# EAGLE board Logic Module V3 (EAGLE 9.6.2)
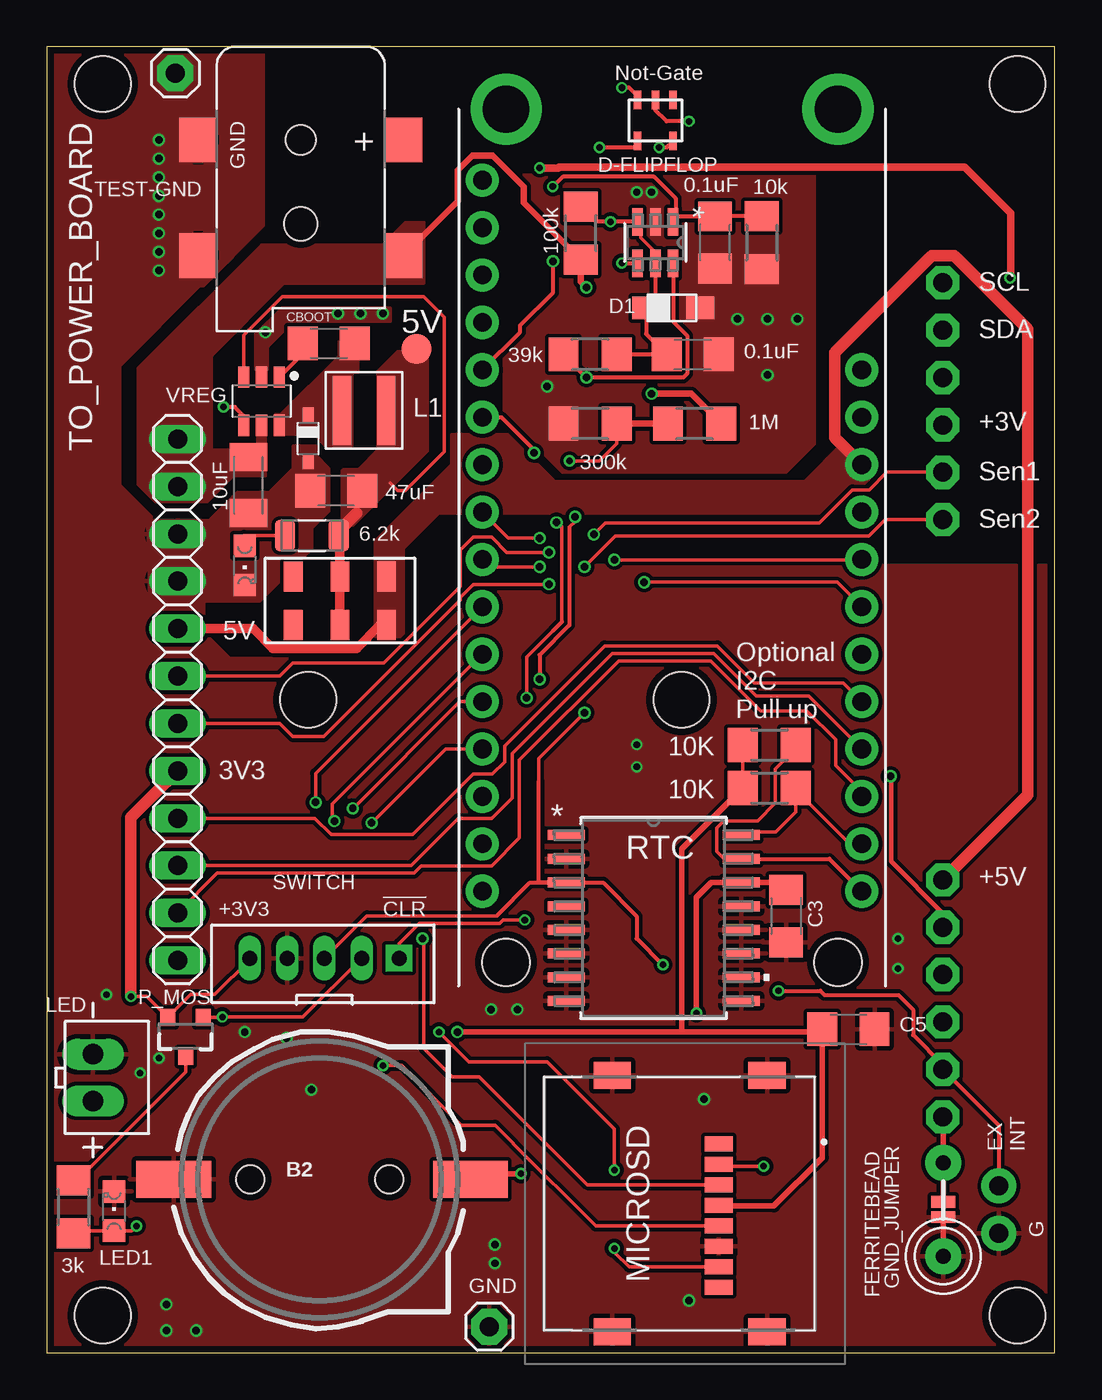
[diagram p0: board, top side]
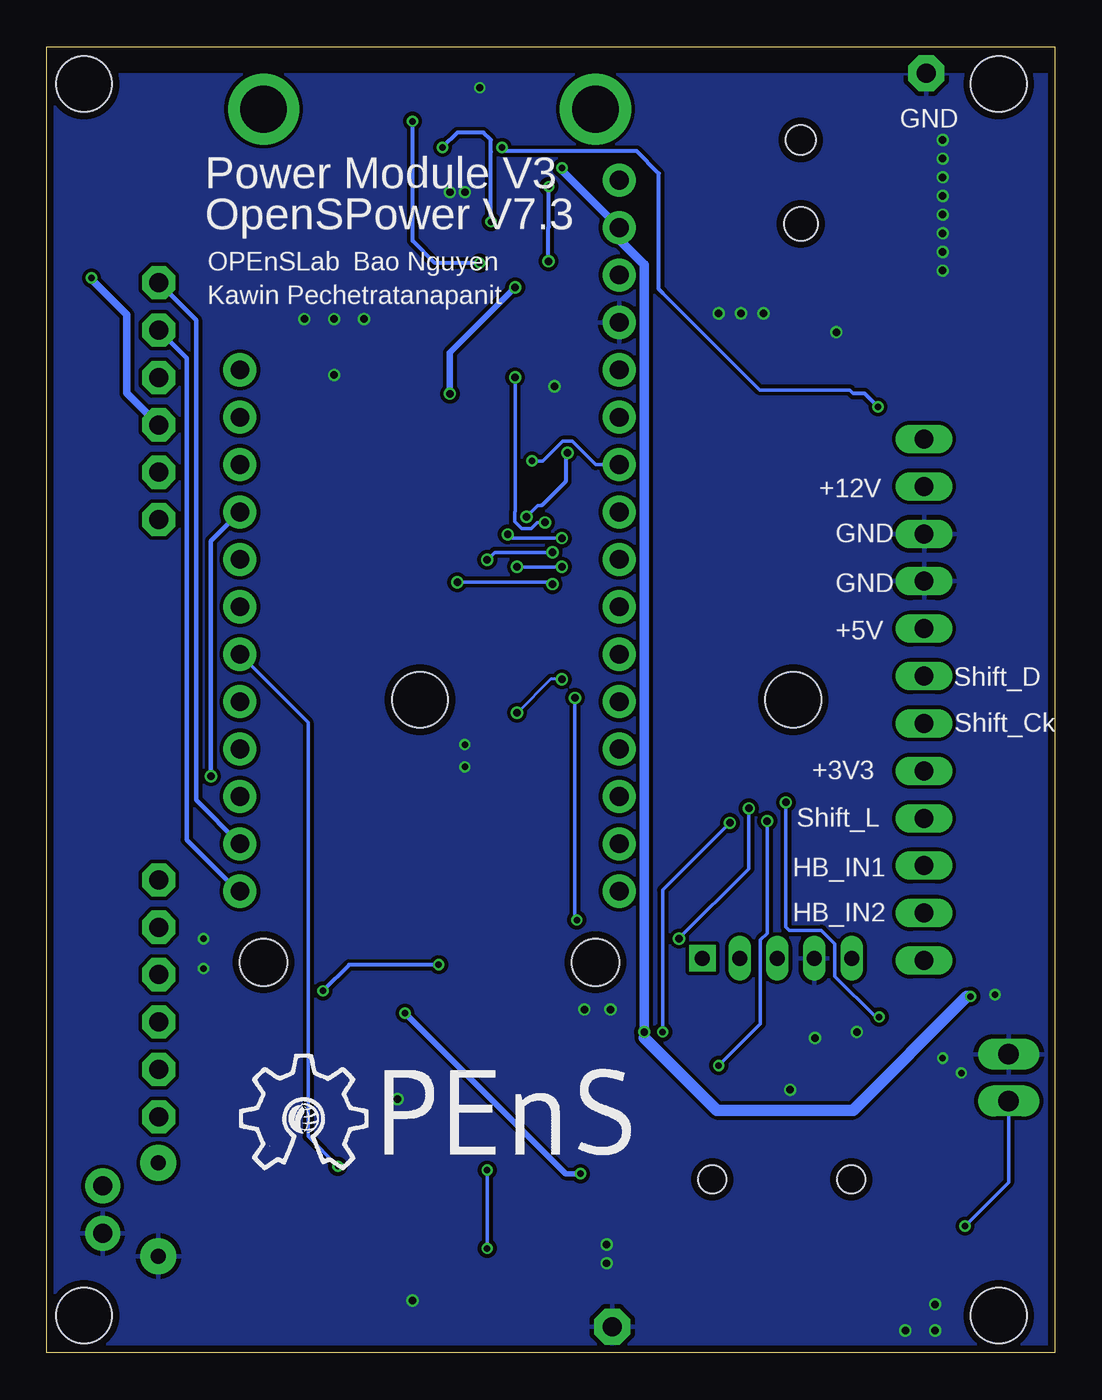
[diagram p1: board, bottom side, seen from below]

Size 54 x 70 mm. Coordinates in mm from the lower left corner, seen from the top.
Outline: 0,0 54,0 54,70 0,70 0,0
Copper layers (1*16): Top 0.035559375mm / dielectric 1.6mm / Bottom 0.035559375mm
Design rules "oshpark-2layer *": minimum track width 6mil, minimum drill 10mil, track to track 6mil, track to pad 6mil, pad to pad 6mil, via to via 6mil, smd to smd 6mil, copper to edge 15mil, drill to drill 6mil, minimum pad ring 5mil, minimum via ring 5mil, stop-mask expansion 2.5mil, vias tented up to drill 30mil, thermal gap 10mil
Net classes: 0 default: clearance 0.2 mm; 1 12v: width 0.356 mm, clearance 0.254 mm; 2 5v: width 0.406 mm, clearance 0.2 mm; 3 sig: width 0.152 mm, clearance 0.2 mm
Holes 3 mm at 3,2 52,68 52,2 14,35 34,35 3,68

## Footprints (pad centres in the part's own frame; a part is rotated, then mirrored left to right if it is on the bottom)
TP16R = smd 1.6 x 1.6: TP 0,0
DCJACK_2MM_SMT = smd 2.4 x 2: GND 0,-5.5; GNDBREAK 6.2,-5.5; PWR1 0,5.5; PWR2 6.2,5.5 | hole 1.6: 0,0 | hole 1.8: 4.5,0
CR1220-2 = smd 4 x 2: + 8.29,0; - -7.6,0 | hole 1.5: 3.95,0; -3.5,0
C1206 = smd 1.6 x 1.8: 1 -1.4,0; 2 1.4,0
C1206K = smd 1.5 x 2: 1 -1.5,0; 2 1.5,0
DO-219AC = smd 1.5 x 1.2: BCK 2.9,0; FNT 0,0
SOD323_ST = smd 0.8 x 0.6: A 1.25,0; C -1.25,0
DBV6 = smd 1.473 x 0.559: 1 -1.118,0.95; 2 -1.118,0; 3 -1.118,-0.95; 4 1.118,-0.95; 5 1.118,0; 6 1.118,0.95
1X02_NO_SILK = drill 1.016 pad 1.88: 1 0,0; 2 2.54,0
FB = drill 0.8 pad 1.93: P$1 -2.5,0; P$2 2.5,0
SMT-JUMPER_2_NO_NO-SILK = smd 0.635 x 1.27: 1 -0.406,0; 2 0.406,0
WE-MAPI_40XX = smd 0.98 x 3.7: 1 -1.185,0; 2 1.185,0
JST_2POS_2.5MM_UP = drill 1.1 long: 1 -1.25,0; 2 1.25,0
CHIPLED_0805 = smd 1.2 x 1.2: A 0,-1.05; C 0,1.05
472192001 = smd 0.8 x 1.5: 1 3.205,-1.8; 2 2.105,-1.8; 3 1.005,-1.8; 4 -0.095,-1.8; 5 -1.195,-1.8; 6 -2.295,-1.8; 7 -3.395,-1.8; 8 -4.495,-1.8 | smd 1.45 x 2: 9 -6.875,-4.4; 10 -6.875,3.9; 11 6.875,3.9; 12 6.875,-4.4
FEATHERWING = drill 1 pad 1.778: 1 6.35,1.27; 2 8.89,1.27; 3 11.43,1.27; 4 13.97,1.27; 5 16.51,1.27; 6 19.05,1.27; 7 21.59,1.27; 8 24.13,1.27; 9 26.67,1.27; 10 29.21,1.27; 11 31.75,1.27; 12 34.29,1.27; 13 36.83,1.27; 14 39.37,1.27; 15 41.91,1.27; 16 44.45,1.27; 17 44.45,21.59; 18 41.91,21.59; 19 39.37,21.59; 20 36.83,21.59; 21 34.29,21.59; 22 31.75,21.59; 23 29.21,21.59; 24 26.67,21.59; 25 24.13,21.59; 26 21.59,21.59; 27 19.05,21.59; 28 16.51,21.59 | drill 2.5 pad 3.81: P$1 2.54,20.32; P$2 2.54,2.54 | hole 2.54: 48.26,20.32; 48.26,2.54
SOT23-3 = smd 0.8 x 0.9: 1 -0.95,-1; 2 0.95,-1; 3 0,1.1
R1206 = smd 1.6 x 1.803: 1 -1.422,0; 2 1.422,0
RES_1206 = smd 1.08 x 1.68: 1 -1.445,0; 2 1.445,0
21-0042B_16 = smd 1.981 x 0.533: 1 -4.686,4.445; 2 -4.686,3.175; 3 -4.686,1.905; 4 -4.686,0.635; 5 -4.686,-0.635; 6 -4.686,-1.905; 7 -4.686,-3.175; 8 -4.686,-4.445; 9 4.686,-4.445; 10 4.686,-3.175; 11 4.686,-1.905; 12 4.686,-0.635; 13 4.686,0.635; 14 4.686,1.905; 15 4.686,3.175; 16 4.686,4.445
2MM_5POS_HEADER = drill 0.8 pad 1.422 square: 1 -4,0 | drill 0.8 long: 2 -2,0; 3 0,0; 4 2,0; 5 4,0
1X01 = drill 1.016 pad 1.93 octagon: 1 0,0
1X12 = drill 1.016 long: 1 -13.97,0; 2 -11.43,0; 3 -8.89,0; 4 -6.35,0; 5 -3.81,0; 6 -1.27,0; 7 1.27,0; 8 3.81,0; 9 6.35,0; 10 8.89,0; 11 11.43,0; 12 13.97,0
1X06-CLEANBIG = drill 1.016 pad 1.778 octagon: 1 -6.35,0; 2 -3.81,0; 3 -1.27,0; 4 1.27,0; 5 3.81,0; 6 6.35,0
JS-DPDT-SMD = smd 1 x 1.6: P$1 0,0; P$2 2.5,0; P$3 5,0; P$4 0,2.6; P$5 2.5,2.6; P$6 5,2.6
SOT753 = smd 1 x 0.4: 1 -1.14,0.95; 2 -1.14,0; 3 -1.14,-0.95; 4 1.06,-0.95; 5 1.06,0.95
SOT23-6 = smd 1.146 x 0.597: 1 -1.287,0.95; 2 -1.287,0; 3 -1.287,-0.95; 4 1.287,-0.95; 5 1.287,0; 6 1.287,0.95

## Placement (x,y rotation side)
5V  TPTP16R  [TP16R]  19.8,53.8 0 top
12V_IN  2.1MMJACKSMT  [DCJACK_2MM_SMT]  13.6,65 270 top
B2  cr1220  [CR1220-2]  14.4,9.3 0 top
C1  0.1uF  [C1206]  34.6,53.5 0 top
C2  0.1uF  [C1206]  35.8,59.5 90 top
C3  0.1uF  [C1206]  39.6,23.4 270 top
C5  100nF  [C1206]  42.94,17.34 0 top
CBOOT  100nF  [C1206]  15.1,54.1 0 top
CIN  10uF  [C1206K]  10.8,46.5 270 top
COUT  47uF  [C1206]  15.5,46.2 180 top
D1  4.3V  [DO-219AC]  32.1,56 0 top
D3  NSR0320MW2T1G  [SOD323_ST]  14,49 270 top
D-FLIPFLOP  SN74LVC1G175DBVR  [DBV6]  32.6,59.5 270 top
EXTERNAL_INT  [1X02_NO_SILK]  51,6.4 90 top
FERRITEBEAD  FB  [FB]  48.02,7.68 270 top
GND_JUMPER  [SMT-JUMPER_2_NO_NO-SILK]  48.02,7.68 90 top
L1  10UH 2.7A  [WE-MAPI_40XX]  17,50.5 0 top
LED  2.5MM_JST_UP_2POS  [JST_2POS_2.5MM_UP]  2.46,14.75 270 top
LED1  Yellow  [CHIPLED_0805]  3.6,7.6 0 top
LED2  RED  [CHIPLED_0805]  10.6,42.2 180 top
MICROSD  47219-2001  [472192001]  34.19,8 90 top
MS1  FEATHERWING  [FEATHERWING]  22.06,69.19 270 top
P_MOS  130mA/20V  [SOT23-3]  7.43,16.97 180 top
R1  1M  [R1206]  34.7,49.8 0 top
R2  300k  [R1206]  29.1,49.8 0 top
R3  10K  [R1206]  38.7,30.27 180 top
R4  3k  [R1206]  1.42,7.82 90 top
R5  10K  [R1206]  38.7,32.57 180 top
R6  100k  [R1206]  28.6,60 270 top
R7  39k  [R1206]  29.1,53.5 0 top
R8  10k  [R1206]  38.3,59.5 90 top
R11  6.2k  [RES_1206]  14.2,43.8 0 top
RTC  DS3231SNT&R  [21-0042B_16]  32.5,23.3 0 top
SWITCH  2MM_JST_PH_5POS  [2MM_5POS_HEADER]  14.87,21.15 180 top
TEST-GND  [1X01]  6.88,68.58 90 top
TEST-GND1  [1X01]  23.7,1.4 0 top
TO_POWER_BOARD  [1X12]  7,35 270 top
TO_SENSOR_BOARD1  [1X06-CLEANBIG]  48,51 270 top
TO_SENSOR_BOARD2  [1X06-CLEANBIG]  48,19 270 top
U$1  2PDT_SWITCHJS-SMD  [JS-DPDT-SMD]  18.2,41.6 180 top
U$2  [OPENS-LOGO]  43.92,6.09 0 bottom
U$3  NOT_GATE  [SOT753]  32.6,66 270 top
VREG  BUCK_REGULATORS  [SOT23-6]  11.5,51 270 top

## Library data of the parts
5V = testpad
12V_IN C1-C3 FERRITEBEAD LED1 LED2 MS1 R1 R2 R6-R8 TEST-GND TEST-GND1 TO_POWER_BOARD TO_SENSOR_BOARD1 TO_SENSOR_BOARD2 = adafruit
B2 = microbuilder
C5 R4 = resistor
CBOOT CIN COUT = rcl; SPICEPREFIX: C
D1 = beach
D3 = diode
D-FLIPFLOP = eDNA; MANUFACTURER_PART_NUMBER: SN74LVC1G175DBVR; VENDOR: Texas Instruments
EXTERNAL_INT = SparkFun-Connectors
GND_JUMPER = SparkFun-Jumpers
L1 = EMCComponents (rev19e); WE-NUMBER: 74438357100/10uH
LED SWITCH U$1 U$3 VREG = eDNA
MICROSD = SamacSys_Parts; DESCRIPTION: Molex 47219 Series 8 Way Horizontal Hinged Micro SD Memory Card Connector with Solder Termination; HEIGHT: mm; MANUFACTURER_NAME: Molex; MANUFACTURER_PART_NUMBER: 47219-2001; MOUSER_PART_NUMBER: 538-47219-2001; MOUSER_PRICE-STOCK: https://www.mouser.com/Search/Refine.aspx?Keyword=538-47219-2001
P_MOS = SparkFun-DiscreteSemi; PROD_ID: TRANS-11153
R3 R5 = rcl; SPICEPREFIX: R
R11 = Resistor_Capacitor; CREATED_BY: PCBLayout.com; DIGIKEY_PART_NUMBER: WSLP-.05TR-ND; MANUFACTURER: Vishay Dale; MPN: WSLP1206R0500FEA; PACKAGE: SMD 1206
RTC = eDNA; MANUFACTURER_PART_NUMBER: DS3231SN#T&R; VENDOR: Maxim Integrated Products
U$2 = opens-logo

## Nets
2.2VCC [sig]: C1.1 D1.FNT D-FLIPFLOP.3 D-FLIPFLOP.5 R6.1 R7.2 U$3.5
5VUSB: 5V.TP COUT.1 L1.2 R11.2 U$1.P$2 U$1.P$5 VREG.3
!CLR: D-FLIPFLOP.6 R7.1 SWITCH.1
!EN: D-FLIPFLOP.4 U$3.2
+3V3: C5.1 MICROSD.4 MS1.2 P_MOS.2 R3.2 R5.2 SWITCH.5 TO_POWER_BOARD.8 TO_SENSOR_BOARD1.4
+5V: MS1.26 TO_POWER_BOARD.5 TO_SENSOR_BOARD2.1 U$1.P$1 U$1.P$4
+12V [12v]: 12V_IN.PWR2 CIN.1 R1.2 R6.2 TO_POWER_BOARD.1 TO_POWER_BOARD.2 VREG.5
BATTERY_READ: MS1.7 R1.1 R2.2
BUTTON1: MS1.25 TO_SENSOR_BOARD2.2
CS: MICROSD.2 MS1.22
DI: MICROSD.3 MS1.12
DO: MICROSD.7 MS1.13
EN: U$3.4 VREG.4
GND: 12V_IN.GND 12V_IN.GNDBREAK B2.- C1.2 C2.1 C3.2 C5.2 CIN.2 COUT.2 D1.BCK D3.A D-FLIPFLOP.2 EXTERNAL_INT.1 FERRITEBEAD.P$2 GND_JUMPER.1 LED1.C LED2.C LED.1 MICROSD.6 MICROSD.9 MICROSD.10 MICROSD.11 MICROSD.12 MS1.4 R2.1 R8.1 RTC.2 RTC.5 RTC.6 RTC.7 RTC.8 RTC.9 RTC.10 RTC.11 RTC.12 RTC.13 SWITCH.4 TEST-GND1.1 TEST-GND.1 TO_POWER_BOARD.3 TO_POWER_BOARD.4 U$3.3 VREG.2
HB_IN1: MS1.20 TO_POWER_BOARD.10
HB_IN2: MS1.19 TO_POWER_BOARD.11
N$1: B2.+ C3.1 RTC.14
N$2: P_MOS.3 R4.2
N$3: LED1.A LED.2 R4.1
N$6: FERRITEBEAD.P$1 GND_JUMPER.2 TO_SENSOR_BOARD2.6
N$12: LED2.A R11.1
N$16: CBOOT.1 VREG.1
N$17: CBOOT.2 D3.C L1.1 VREG.6
RTC_INT: EXTERNAL_INT.2 MS1.6 RTC.3 SWITCH.3 TO_SENSOR_BOARD2.5
SCK: MICROSD.5 MS1.11
SCL: MS1.18 R3.1 RTC.16 TO_SENSOR_BOARD1.1
SDA: MS1.17 R5.1 RTC.15 TO_SENSOR_BOARD1.2
SENSOR1: MS1.8 TO_SENSOR_BOARD1.5
SENSOR2: MS1.9 TO_SENSOR_BOARD1.6
SHIFT_CLK: MS1.23 TO_POWER_BOARD.7
SHIFT_DATA: MS1.24 TO_POWER_BOARD.6
SHIFT_LATCH: MS1.21 TO_POWER_BOARD.9
SHUTDOWN: C2.2 D-FLIPFLOP.1 MS1.5 R8.2
WAKE_NOSLEEP: MS1.10 P_MOS.1 SWITCH.2

## Tracks (layer width: path | path; a pad name or v marks a point on that pad's centre or on a via)
2.2VCC  (via drill 0.35)
  Top 0.2: D-FLIPFLOP.3 31.82,60.45 31.82,59.76 32.6,58.98 D-FLIPFLOP.5
  Top 0.203: D-FLIPFLOP.5 32.6,56.5 D1.FNT 32.1,54.6 C1.1 R7.2 | R6.1 29.4,60.62 v30.2,60.62 D-FLIPFLOP.3 | v32.8,64.6 33.21,64.6 U$3.5
  Bottom 0.203: v30.2,60.62 30.2,64.35 30.2,65 30.6,65.4 32,65.4 v32.8,64.6
5VUSB
  Top 0.2: VREG.3 10.55,54.55 12.6,56.6 20.2,56.6 21.3,55.5 21.3,48.3 19.2,46.2 18.8,46.2 18.4,46.6
  Top 0.406: 15.7,43.74 R11.2
  Top 0.508: 15.7,43.74 U$1.P$2 U$1.P$5 | 16.9,45.6 COUT.1
  Top 0.61: R11.2 15.64,44.05 16.6,45
  pour Top (no thermals): 17.7,52.6 18.8,53.7 20.4,53.7 20.4,48.3 16.4,44.3 15.8,44.3 15.8,47.3 15.9,47.4 16.7,47.4 17.7,48.4
!CLR  (via drill 0.35, 0.4)
  Top 0.2: 27.59,39.17 27.59,44.29 27.51,44.29 v27.3,44.5 | 27.11,38.69 25.7,37.28 v25.7,35.1 | v25.6,23.2 24.44,23.2 24.27,23.02 19.94,23.02 18.87,21.95 SWITCH.1
  Top 0.203: D-FLIPFLOP.6 33.55,55.28 34.3,54.52 34.3,52.48 34.1,52.27 v28.91,52.27 R7.1 | 27.59,39.17 27.11,38.69
  Bottom 0.2: v25.7,35.1 25.7,23.5 25.6,23.4 v25.6,23.2 | v27.3,44.5 27.71,44.5 28.04,44.17 28.56,44.17 28.93,44.54 28.93,45.06 28.91,45.08 v28.91,52.27
!EN  (via drill 0.35)
  Top 0.203: D-FLIPFLOP.4 30.82,58.38 v30.8,58.4 | v34.4,66 33.2,66 32.6,66.6 U$3.2
  Bottom 0.203: v30.8,58.4 33.2,58.4 34.4,59.6 v34.4,66
+3V3  (via drill 0.35, 0.4)
  Top 0.2: R3.2 R5.2 | v4.5,19.1 5.35,19.1 P_MOS.2 7.71,19.2 9,19.2 10.87,21.07 SWITCH.5
  Top 0.305: v21.99,17.2 34,17.2 | 34,17.2 41.4,17.2 C5.1 41.54,10.46 38.95,7.87 36.02,7.87 MICROSD.4 | R3.2 34,27 34,17.2
  Top 0.406: v26.4,63.5 27.39,63.5 27.41,63.53 49.17,63.53 51.63,61.07 51.63,57.63 v51.6,57.6
  Top 0.61: TO_POWER_BOARD.8 5.73,29.92 5.71,29.92 4.5,28.7 v4.5,19.1
  Bottom 0.406: MS1.2 26.4,63.37 v26.4,63.5 | v51.6,57.6 51.6,57.53 49.7,55.63 49.7,51.43 TO_SENSOR_BOARD1.4
  Bottom 0.508: MS1.2 23.33,59.66 21.99,58.32 v21.99,17.2 21.99,16.89
  Bottom 0.61: 21.99,16.89 18.1,13 10.8,13 4.7,19.1 v4.5,19.1
+5V
  Top 0.508: TO_POWER_BOARD.5 11.05,38.81 12.11,37.75 16.59,37.75 17.84,39 U$1.P$4
  Top 0.61: TO_SENSOR_BOARD2.1 52.55,29.89 52.55,54.85 48.6,58.8 47.4,58.8 42.9,54.3 42.2,53.6 42.2,49.05 MS1.26
  pour Top (no thermals): 17.6,38.4 17.6,43.5 21.7,47.6 21.7,49.2 24.7,49.2 27.2,46.7 40.6,46.7 42.7,48.8 44.2,47.3 44.2,47 42.2,45 21,45 19.1,43.1 19.1,38.4
+12V  (via drill 0.4)
  Top 0.356: 12V_IN.PWR2 22.01,61.71 22.01,63.39 22.78,64.16 23.88,64.16 25.55,62.49 25.55,61.63 R6.2 28.6,57.4 v28.9,57.1 | v32.4,51.4 34.52,51.4 R1.2
  Bottom 0.356: v28.9,57.1 32.4,53.6 v32.4,51.4
  pour Top (no thermals): 20.2,60.6 20.2,57.3 12.7,57.3 8.8,53.4 8.8,48.4 11.1,48.4 11.3,48.6 11.3,49.7 11.7,49.7 11.7,46.98 9.98,46.98 8.6,45.6 5.8,45.6 4.9,46.5 4.9,52.8 11.5,59.4 18,59.4 19.2,60.6
BATTERY_READ  (via drill 0.35)
  Top 0.2: v28,47.8 29.6,47.8 30.52,48.72 R2.2
  Top 0.356: R2.2 R1.1
  Bottom 0.2: MS1.7 24.59,47.6 25.84,48.85 26.36,48.85 27.41,47.8 v28,47.8
BUTTON1  (via drill 0.4)
  Top 0.254: TO_SENSOR_BOARD2.2 48,23.55 45.23,26.32 45.23,30.87 v45.2,30.9
  Bottom 0.254: MS1.25 45.2,43.51 v45.2,30.9
CS  (via drill 0.35)
  Top 0.2: v38.4,10 36.09,10 MICROSD.2
  Bottom 0.2: MS1.22 40,33.79 40,11.6 v38.4,10
DI  (via drill 0.4)
  Top 0.2: MS1.12 22.13,34.9 16.41,29.18 v16.39,29.18 | v20.13,22.2 20.2,22.13 20.2,16.31 21.7,14.8 23.17,14.8 28.96,9.01 MICROSD.3
  Bottom 0.2: v20.13,22.2 16.39,25.94 v16.39,29.18
DO  (via drill 0.35, 0.4)
  Top 0.2: v17.4,28.4 21.36,32.36 MS1.13 | v21,17.2 22.6,15.6 26.8,15.6 30.4,12 v30.4,9.8 | MICROSD.7 31.2,4.61 30.4,5.4 v30.4,5.6
  Bottom 0.2: v17.4,28.4 21,24.8 v21,17.2 | v30.4,9.8 v30.4,5.6
EN  (via drill 0.35)
  Top 0.203: VREG.4 10.55,50.21 10.07,50.69 v9.46,50.69 | v29.6,64.6 31.51,64.6 31.65,64.74 U$3.4
  Bottom 0.2: 10.78,51.42 10.97,51.6 15.8,51.6 21,56.8
  Bottom 0.203: 10.78,51.42 10.18,51.42 v9.46,50.69 | 21,56.8 21.2,57 21.2,63.2 22.4,64.4 29.4,64.4 v29.6,64.6
GND  (via drill 0.35, 0.4)
  Top 0.203: U$3.3 31.65,67.34 31.19,67.8 v30.8,67.8
  Top 0.305: GND_JUMPER.1 FERRITEBEAD.P$2
  other vias: 11.7,54.7 15.6,55.7 16.8,55.7 18,55.7 37,55.4 38.6,55.4 40.2,55.4 38.6,52.4 31.6,62.2 32.4,62.2 6,65 6,64 6,62 6,61 6,60 6,59 6,63 6,58 26.8,51.8 12.84,16.87 10.6,17.2 24,4.8 24,5.8 23.8,18.4 25.2,18.4 34.4,2.8 35.2,13.6 6.4,1.2 8,1.2 6.4,2.6 14.17,14.1 3.2,19.2 6,15.8 5,15 45.6,22.2 45.6,20.6 31.6,32.6 31.6,31.4
  pour Top (no thermals): 11.2,52.7 11.2,54.6 12.6,56 18.4,56 18.4,55.3 13.2,55.3 11.8,53.9 11.8,52.7
  pour Bottom: 0,68.5 54.2,68.5 54.2,0.6 53.8,0.2 0,0.2
  pour Top (no thermals): 5.41,44.59 8.69,44.59 10.2,46.1 11.9,46.1 13.2,47.4 13.2,48.6 14.4,48.6 14.4,48.1 15.1,47.4 15.1,45.1 14.2,44.2 14.2,43.1 11.4,40.3 5.5,40.3
  pour Top (no thermals): 24.5,62.7 24.5,50.3 25.6,49.2 27.6,47.2 39.6,47.2 41.1,48.7 41.1,63.1 24.9,63.1
  pour Top: 3.93,46.47 0,42.54 0,0.2 0.2,0 54.2,0 54.2,42 54,42.2 24.4,42.2 19.4,37.2 9.8,37.2 8.4,38.6 8.4,44.62 5.78,44.62
  pour Top (no thermals): 0,69.8 11.4,69.8 11.6,70 11.6,60.4 8.4,57.2 8.2,57.2 3.89,52.89 3.89,42.89 0.8,39.8 0,39.8
HB_IN1
  Top 0.2: TO_POWER_BOARD.10 19.51,26.11 22.03,28.63 23.82,28.63 24.92,29.73 24.92,32.12 30.28,37.48 35.72,37.48 38,35.2 40.81,35.2 MS1.20
HB_IN2
  Top 0.2: TO_POWER_BOARD.11 9.14,25.71 19.68,25.71 20.06,26.09 23.82,26.09 25.32,27.59 25.32,31.77 30.63,37.08 35.55,37.08 38.24,34.4 40.72,34.4 42.26,32.86 42.26,31.47 43.65,30.08 MS1.19
N$1  (via drill 0.35)
  Top 0.305: v34.8,18.2 34.8,24.4 35.6,25.2 RTC.14 39.2,25.2 C3.1 | v25.4,9.6 22.99,9.6 B2.+
  Bottom 0.305: v34.8,18.2 26.2,9.6 v25.4,9.6
N$2
  Top 0.2: P_MOS.3 7.44,15.86 7.44,15.07 1.62,9.24 R4.2
N$3  (via drill 0.35)
  Top 0.2: R4.1 1.57,6.55 LED1.A 4.55,6.55 v4.8,6.8
  Bottom 0.2: v4.8,6.8 2.46,9.14 LED.2
N$6
  Top 0.305: TO_SENSOR_BOARD2.6 48.02,12.63 FERRITEBEAD.P$1 GND_JUMPER.2
N$12
  Top 0.2: LED2.A 10.6,43.75 10.55,43.8 R11.1
N$16
  Top 0.203: CBOOT.1 13.66,53.5 VREG.1
N$17
  pour Top (no thermals): 12.2,49.2 14.3,49.2 15,48.5 16.7,48.5 16.7,54.2 15.6,54.2 15.6,53.4 12.5,50.3 12.2,50.3
RTC_INT  (via drill 0.35, 0.4)
  Top 0.2: SWITCH.3 17.14,23.43 24.1,23.43 | v28.3,44.8 28.3,44.55 27.99,44.24 | 26.34,30.61 26.34,31.84 v28.8,34.3
  Top 0.203: RTC.3 25.88,25.2 24.1,23.43 | RTC.3 26.34,25.2 26.34,30.61 | RTC.3 29.8,25.2 31.6,23.4 31.6,22.2 v33,20.8 | v39.2,19.4 41.43,19.4 41.65,19.18 45.62,19.18 46.41,18.39 46.41,17.04 48,15.45 TO_SENSOR_BOARD2.5 51,12.19 EXTERNAL_INT.2 | v26.1,48.23 26.1,48.37 24.33,50.14 MS1.6 | v26.4,36.1 26.4,37.41 27.99,39 27.99,44.24
  Bottom 0.152: v26.4,36.1 27,36.1 v28.8,34.3
  Bottom 0.2: v28.3,44.8 27.69,45.41 27.49,45.41
  Bottom 0.203: v33,20.8 37.8,20.8 v39.2,19.4 | v26.1,48.23 26.2,48.13 26.2,46.7 27.49,45.41
SCK  (via drill 0.35, 0.4)
  Top 0.2: MS1.11 15.3,29.41 15.3,28.6 v15.4,28.5 | v18,15.4 19,15.4 22.2,12.2 24.01,12.2 24.99,11.22 24.99,11.21 29.4,6.8 MICROSD.5
  Bottom 0.2: v18,15.4 15.77,17.63 15.77,22.12 15.4,22.49 v15.4,28.5
SCL
  Top 0.2: RTC.16 37.35,27.91 39.04,27.91 40.12,29 R3.1 40.12,30.17 43.02,27.28 MS1.18
  Bottom 0.254: TO_SENSOR_BOARD1.1 46,55.35 46,29.63 MS1.18
SDA
  Top 0.2: R5.1 40.12,32.4 39.02,31.3 39.02,29.46 38.07,28.51 36.27,28.51 35.9,28.14 35.9,26.86 36.43,26.33 37.04,26.33 RTC.15
  Top 0.203: RTC.15 41.91,26.48 MS1.17
  Bottom 0.254: TO_SENSOR_BOARD1.2 46.5,53.31 46.5,27.5 43.74,24.74 MS1.17
SENSOR1  (via drill 0.4)
  Top 0.2: v26.4,43.66 24.73,43.66 MS1.8 | TO_SENSOR_BOARD1.5 45,47.19 44.06,46.25 43.16,46.25 41.37,44.46 29.9,44.46 v29.3,43.86
  Bottom 0.2: v29.3,43.86 29.1,43.66 v26.4,43.66
SENSOR2  (via drill 0.4)
  Top 0.2: v26.4,42.12 23.73,42.12 MS1.9 | TO_SENSOR_BOARD1.6 44.92,44.65 44.04,43.77 30.45,43.77 v28.8,42.12
  Bottom 0.2: v26.4,42.12 v28.8,42.12
SHIFT_CLK  (via drill 0.4)
  Top 0.2: TO_POWER_BOARD.7 12.47,33.73 13.18,33.02 14.82,33.02 22.14,40.34 22.14,40.47 22.84,41.17 26.87,41.17 v26.9,41.2 | v32,41.3 42.33,41.3 MS1.23
  Bottom 0.2: v26.9,41.2 27,41.3 v32,41.3
SHIFT_DATA  (via drill 0.4)
  Top 0.2: TO_POWER_BOARD.6 12.47,36.27 13.18,36.98 18.05,36.98 22.14,41.07 22.14,43.01 22.84,43.71 23.82,43.71 24.63,42.9 v26.9,42.9 | MS1.24 43.63,42.5 v30.4,42.5
  Bottom 0.2: v26.9,42.9 30,42.9 v30.4,42.5
SHIFT_LATCH
  Top 0.2: MS1.21 42.65,35.9 37.9,35.9 35.92,37.88 29.88,37.88 24.52,32.52 24.52,31.67 23.86,31.01 22.84,31.01 19.6,27.77 15.24,27.77 14.36,28.65 TO_POWER_BOARD.9
SHUTDOWN  (via drill 0.35, 0.4)
  Top 0.203: R8.2 35.82,60.92 C2.2 33.83,60.9 D-FLIPFLOP.1 33.68,60.75 33.68,61.88 32.54,63.02 27.62,63.02 v27.1,62.5 | MS1.5 25.36,54.71 25.36,55.07 27.12,56.83 v27.12,58.5
  Bottom 0.203: v27.1,62.5 27.1,60.35 27.12,60.33 v27.12,58.5
WAKE_NOSLEEP  (via drill 0.35, 0.4)
  Top 0.2: MS1.10 14.4,31.05 v14.4,29.5 | P_MOS.1 9.37,17.97 v9.4,18 13.72,18 SWITCH.2
  Bottom 0.2: v14.4,29.5 14.4,22.82 14.23,22.65 12.49,22.65 11.77,21.92 11.77,20.18 9.59,18 v9.4,18

## Text on the board
tPlace: Not-Gate | SCL | SDA | +3V | Sen1 | Sen2 | 5V | Optional / I2C / Pull up | 3V3 | +5V | +3V3 | !CLR | EX / INT | G | GND
bPlace: GND | Power Module V3 | OpenSPower V7.3 | Bao Nguyen | OPEnSLab | Kawin Pechetratanapanit | +12V | GND | GND | +5V | Shift_D | Shift_Ck | +3V3 | Shift_L | HB_IN1 | HB_IN2